# Altium PCB main.PcbDoc
Units mil, origin at the board's own origin, x right, y up, seen from the top; angles counter-clockwise.
Board outline 2372.45 x 1781.88 mil, 4 copper layers (Top Layer, GND, PWR, Bottom Layer), stack 23.756 mil thick; 73 components, 41 nets, 258 pads, 159 vias.
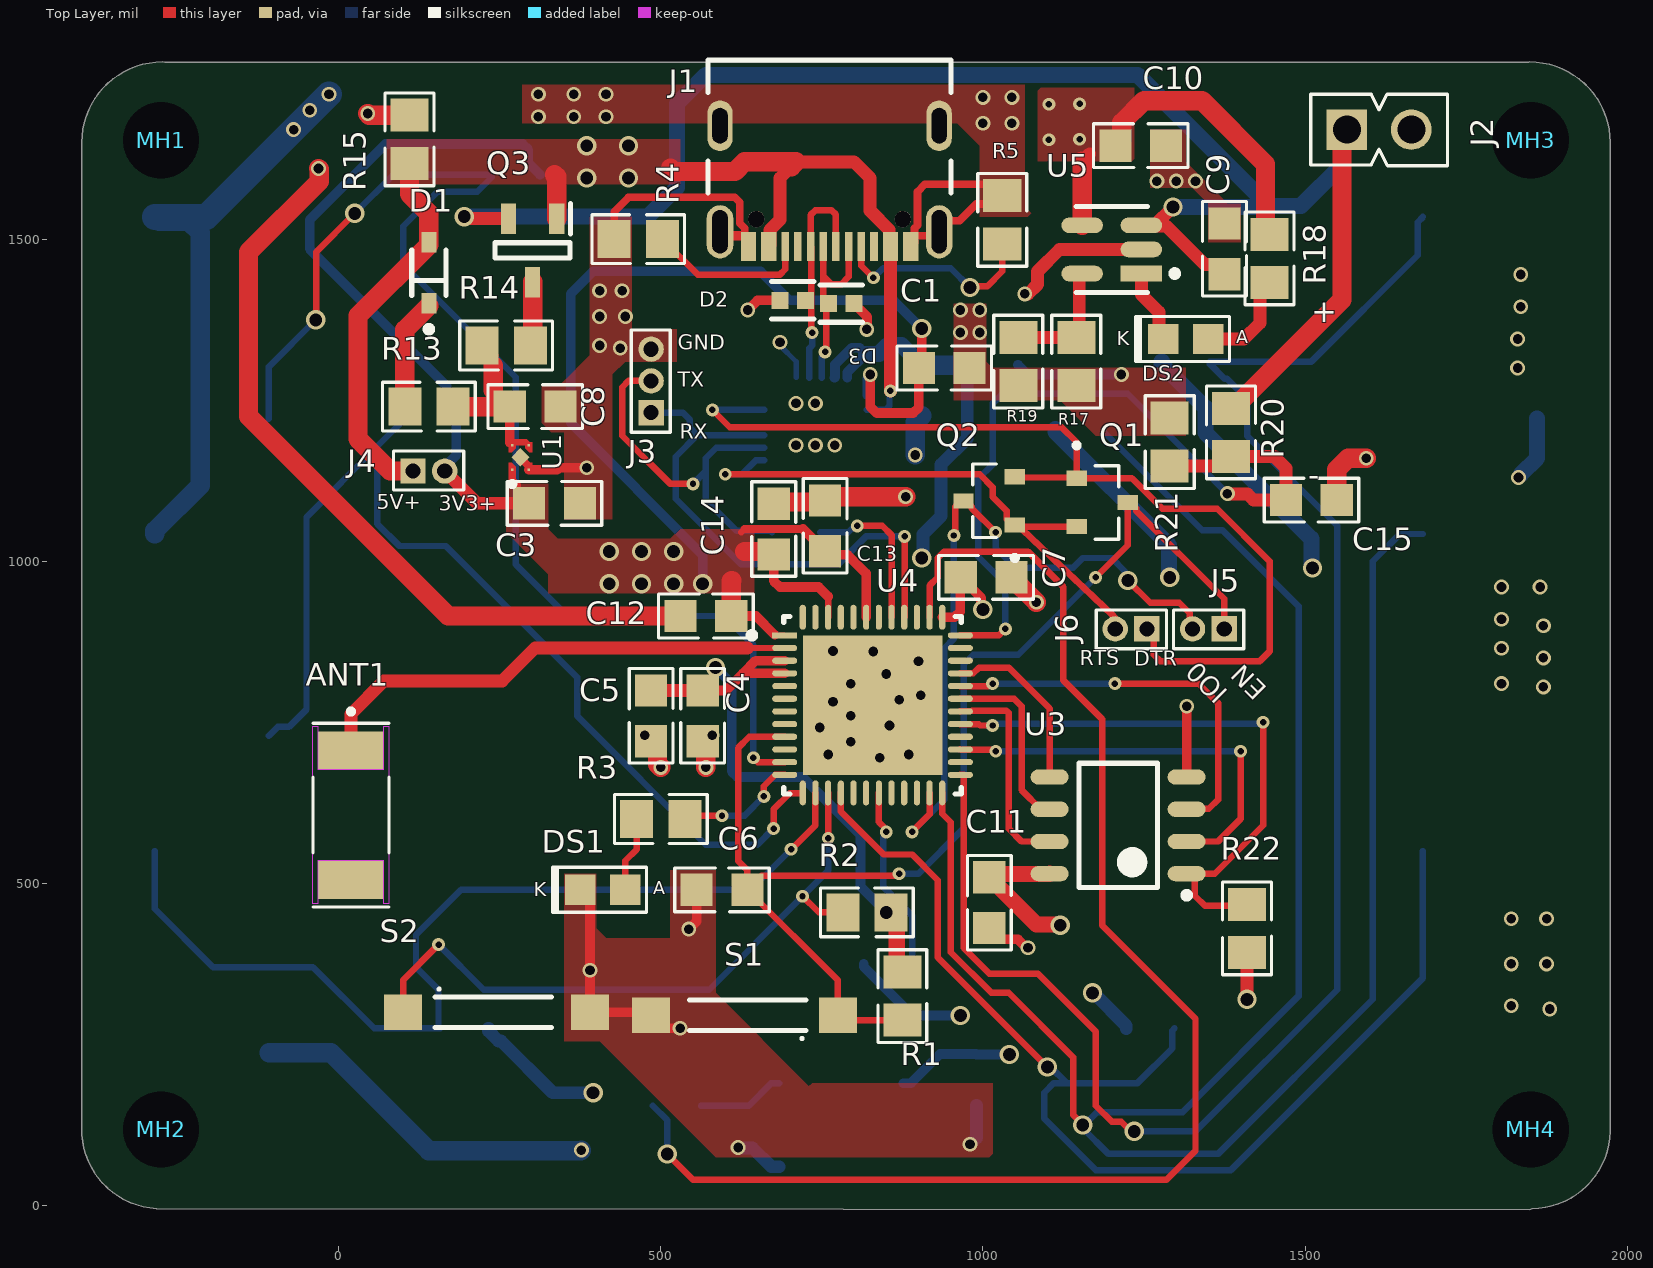
[diagram p0: Top Layer view]
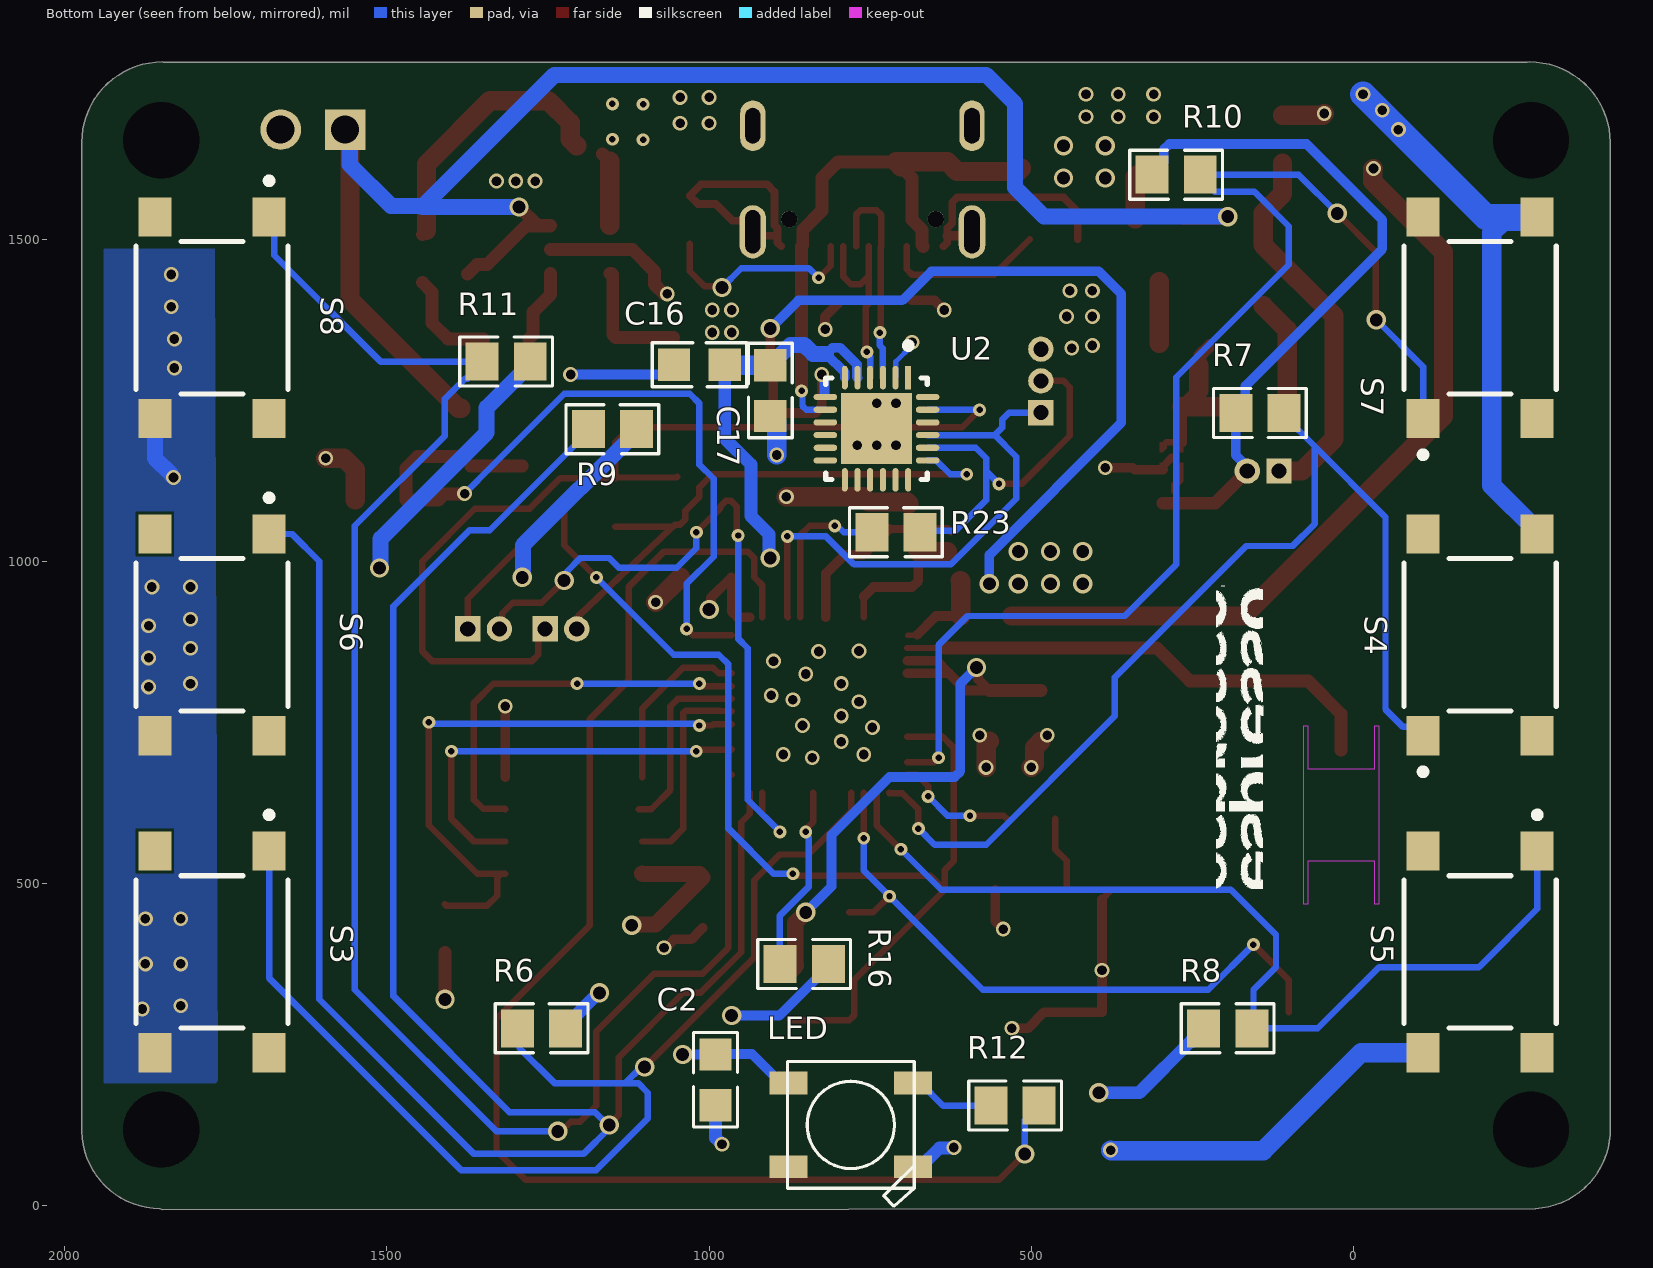
[diagram p1: Bottom Layer view, seen from below]
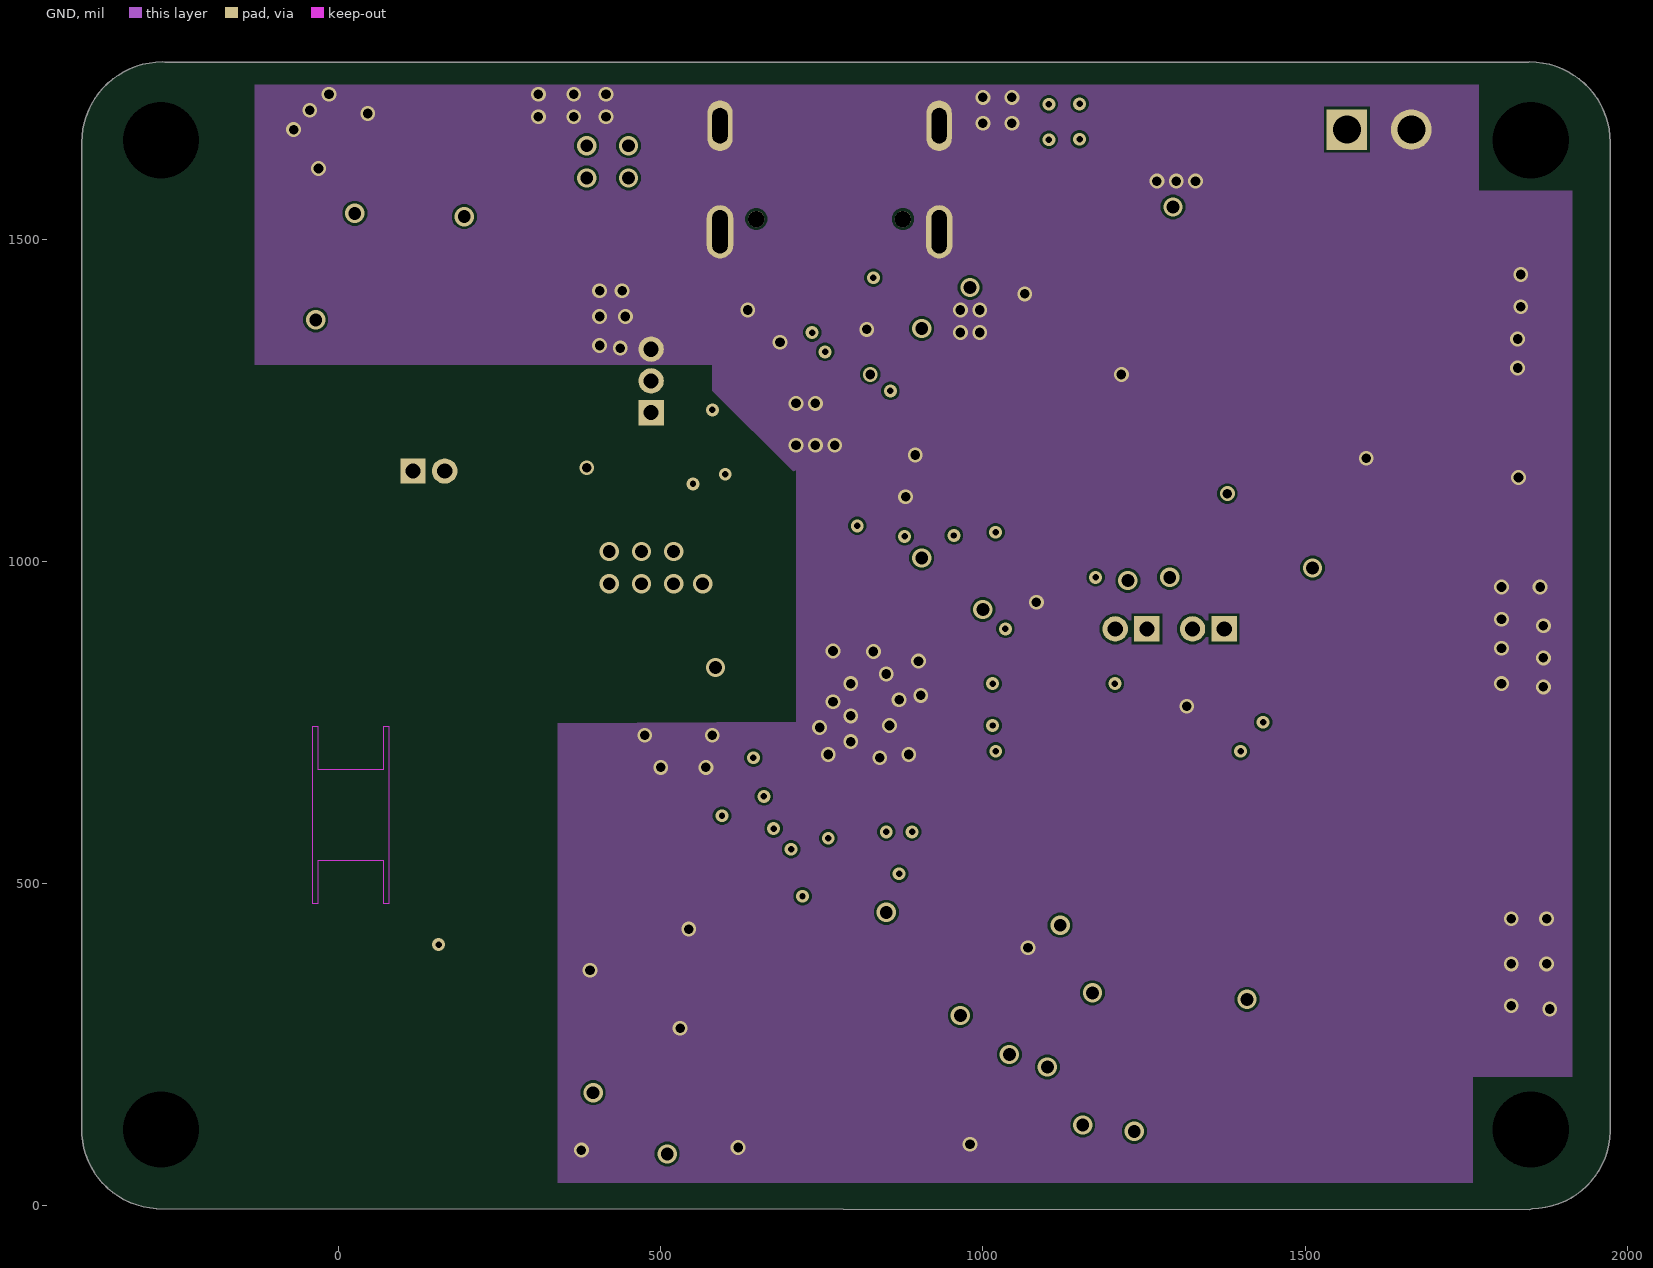
[diagram p2: GND]
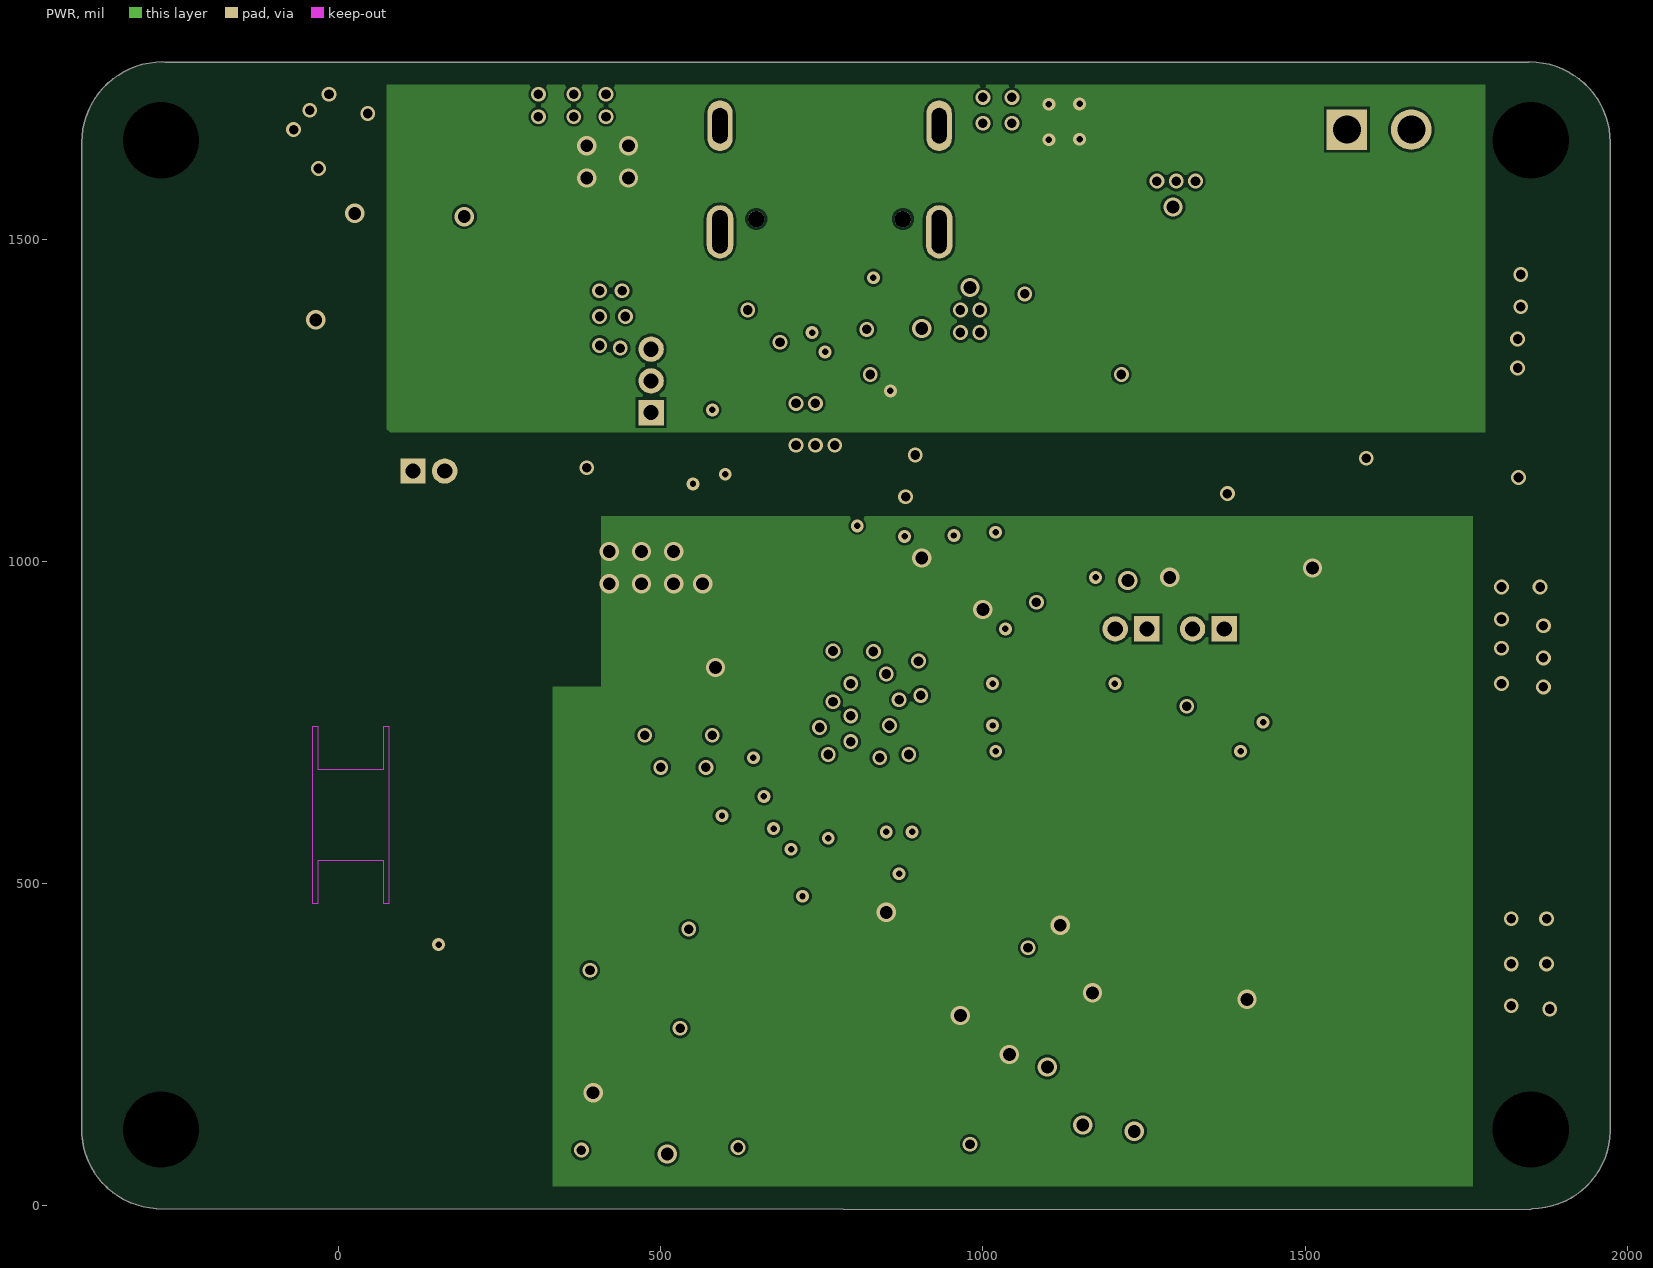
[diagram p3: PWR]
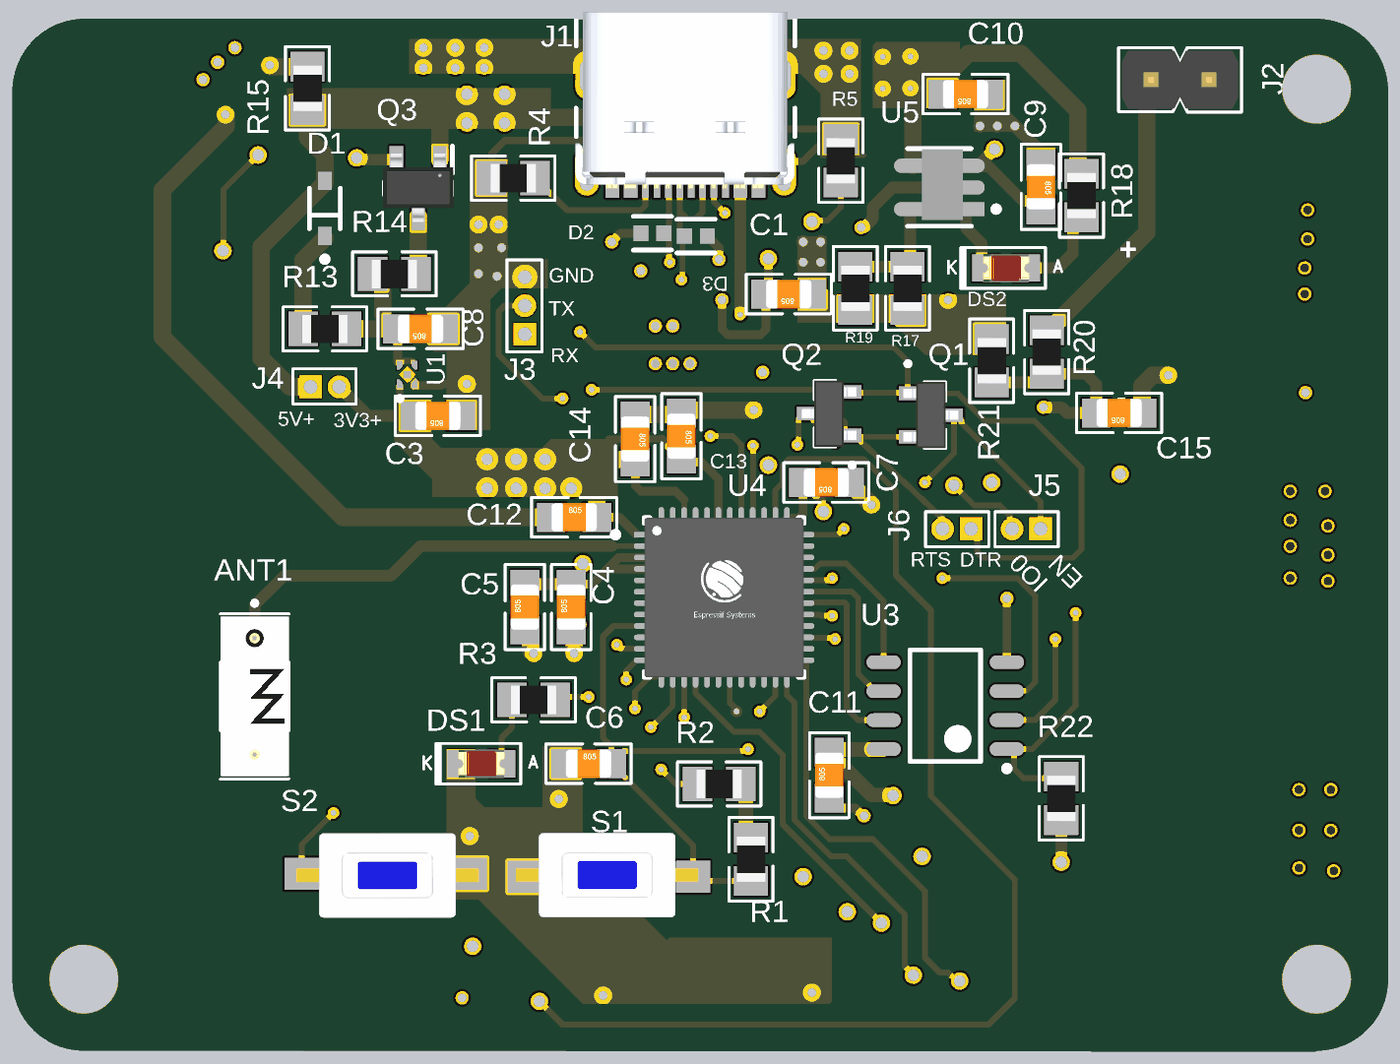
[diagram p4: 3D render of the assembled board from above, using the file's embedded part models]
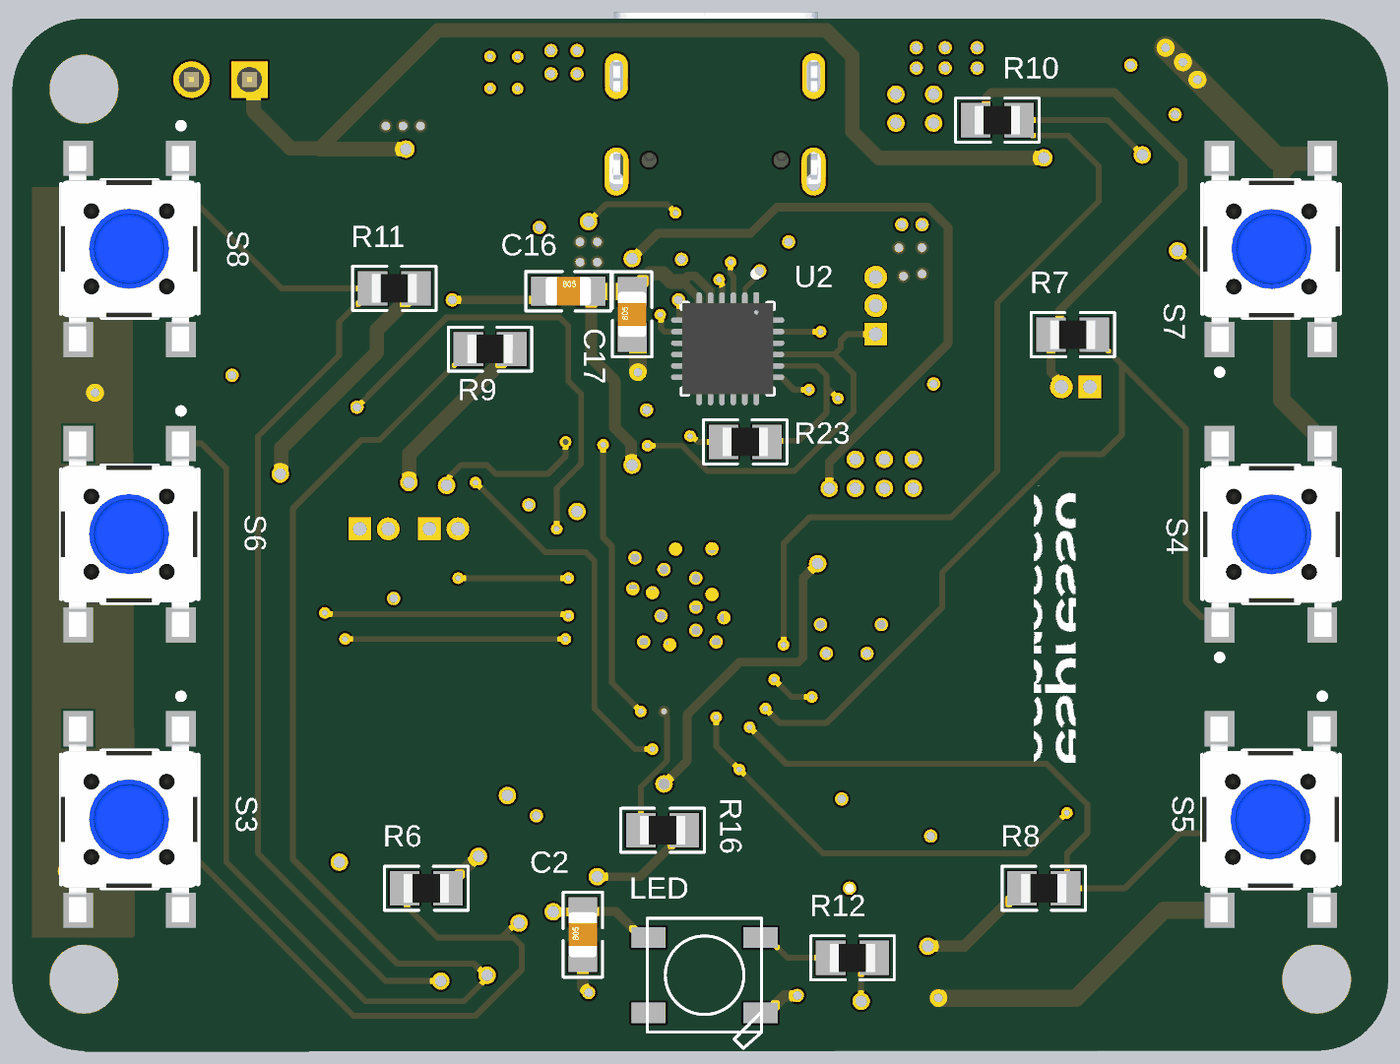
[diagram p5: 3D render of the assembled board from below, using the file's embedded part models]

## Layer stack, top to bottom
Top Solder: solder mask 0.4, Solder Resist, Dk 3.5
Top Layer: signal copper 1.4
Dielectric 2: prepreg 2.8, PP-006, Dk 4.1
GND: signal copper 1.378
Dielectric 1: dielectric 12.6, FR-4, Dk 4.8
PWR: signal copper 1.378
Dielectric 3: prepreg 2.8, PP-006, Dk 4.1
Bottom Layer: signal copper 1.4
Bottom Solder: solder mask 0.4, Solder Resist, Dk 3.5

## Board outline
-282.73,-4.87 cw(c-276.22,117.5) -398.73,120.11 -398.72,120.44 -398.72,1650 cw(c-273.7,1650) -273.7,1775.01 -270,1774.82 1847.31,1774.82 1848.7,1775.01 cw(c1848.7,1650) 1973.72,1650 1973.52,1648.61 1973.52,116.32 1973.7,114.89 cw(c1851.18,117.5) 1852.56,-5.03 1848.68,-6.87

## Design rules (kind name [scope] priority, off if disabled: settings)
Clearance [All] p1: gap=4 ignorepadtopadclearanceinfootprint=FALSE except(0: SMDPad-Hole THPad-Hole Via-Hole Fill-Hole Poly-Hole Region-Hole Text-Hole)
HoleSize [All] p1: absolutevalues=TRUE maxlimit=1000 minlimit=1 maxpercent=80.000 minpercent=20.000
MinimumSolderMaskSliver [All] p1: minsoldermaskwidth=2.8
PlaneConnect [All] p1: planeconnectstyle=Direct reliefexpansion=20 reliefentries=4 reliefconductorwidth=10 reliefairgap=10
PolygonConnect [All] p1: connectstyle=Direct reliefconductorwidth=10 reliefentries=4 polygonreliefangle="90 Angle" airgapwidth=10
RoutingVias [All] p1: holewidth=20 width=30 viastyle="Through Hole" minholewidth=10 minwidth=10 maxholewidth=30 maxwidth=50
SilkToSilkClearance [All] p1: silktosilkclearance=4
SilkToSolderMaskClearance [IsText] p1: minsilkscreentomaskgap=4 clearancetoexposedcopper=TRUE
SolderMaskExpansion [All] p1: expansion=4 istentingtop=FALSE
Width [All] p1: maxlimit=40 minlimit=4 preferedwidth=6
25 further rules are at their usual default settings.

## Classes and differential pairs
component class POWER-BATTERY: C3 C8 C9 C10 C15 D1 DS2 J2 Q3 R13 R14 R15 R17 R18 R19 R20 R21 U1 U5
component class SERIAL-CHIP: C1 C16 C17 D2 D3 J1 J3 J4 J5 J6 R4 R5 U2
component class RESET-SWITCHES: C2 LED MH1 MH2 MH3 MH4 Q1 Q2 R1 R6 R7 R8 R9 R10 R11 R12 S1 S3 S4 S5 S6 S7 S8
component class ESP32-PICO-D4-MCU: ANT1 C4 C5 C6 C7 C11 C12 C13 C14 DS1 R2 R3 R16 R22 R23 S2 U3 U4

## Components (designator, comment, footprint, x,y, rotation, side; value= is the part's Value field where it differs from the comment)
ANT1 "Fractus Antenna" Fractus_Antenna_NN01-102 20,600 r270 top
C1 "0.1uF" CAP_0805 940,1300 r180 top
C2 "0.1uF" CAP_0805 990,195 r90 bottom
C3 "1uF" CAP_0805 335,1090 r180 top
C4 "0.1uF" CAP_0805 565,760 r90 top
C5 "0.1uF" CAP_0805 485,760 r90 top
C6 "1uF" CAP_0805 595,490 r0 top
C7 "0.1uF" CAP_0805 1005,975 r180 top
C8 "1uF" CAP_0805 305,1240 r180 top
C9 "10uF" CAP_0805 1375,1485 r270 top
C10 "10uF" CAP_0805 1245,1645 r180 top
C11 "1uF" CAP_0805 1010,470 r90 top
C12 "0.1uF" CAP_0805 570,915 r0 top
C13 "0.1uF" CAP_0805 755,1055 r270 top
C14 "0.1uF" CAP_0805 675.32,1050 r270 top
C15 "0.1uF" CAP_0805 1510,1095 r180 top
C16 "1uF" CAP_0805 1015,1305 r180 bottom
C17 "0.1uF" CAP_0805 905,1265 r90 bottom
D1 "DIO_SD103AWS-E3-08_eec" diode_SD103AWS 140,1506.76 r90 top
D2 "DIO-TVS-4V-LXES15AAA1-153" Murata_LXES15_IPC_A 705,1405 r180 top
D3 "DIO-TVS-4V-LXES15AAA1-153" Murata_LXES15_IPC_A 780,1400 r0 top
DS1 "LED BLUE" LED_0805 410,490 r0 top
DS2 "LED ORANGE" LED_0805 1315,1345 r0 top
J1 "CON_USB_C_USB2.0_USB4105-GF-A" CON_USB_C_USB2.0_USB4105-GF-A 680,1650 r180 top
J2 "BERSTICK 2.5MM, MALE" CON2_100_43D62_TH_ST 1615,1670 r0 top
J3 "1.25MM STARIGHT" CON3_probing_1.25mm 485,1280 r90 top
J4 "653002114822" CON2_probing_1.25mm 140,1140 r0 top
J5 "653002114822" CON2_probing_1.25mm 1350,895 r180 top
J6 "653002114822" CON2_probing_1.25mm 1230,895 r180 top
LED "LED_RGB_WS2812B" WS2812B 780,125 r0 bottom
MH1 "Mounting Hole" MOUNTING-NO-COPPER#1 2375,120 r0 top
MH2 "Mounting Hole" MOUNTING-NO-COPPER#2 85,95 r0 top
MH3 "Mounting Hole" MOUNTING-NO-COPPER#3 1650,740 r0 top
MH4 "Mounting Hole" MOUNTING-NO-COPPER#4 1465,85 r0 top
Q1 "TRANS_NPN_SS8050-G" TRANS_NPN_SS8050-G 1180,1100 r0 top
Q2 "TRANS_NPN_SS8050-G" TRANS_NPN_SS8050-G 1015,1085 r180 top
Q3 "MOSFET-P-30V-4A-AO3401A" P_channelMos_AO3401A 306.98,1439.57 r270 top
R1 "10K" RES_0805 875,325 r90 top
R2 "10K" RES_0805 820,455 r180 top
R3 "100R" RES_0805 500,600 r0 top
R4 "5.1K" RES_0805 465,1500 r0 top
R5 "5.1K" RES_0805 1030,1530 r270 top
R6 "10K" RES_0805 1260,275 r0 bottom
R7 "10K" RES_0805 145,1230 r180 bottom
R8 "10K" RES_0805 195,275 r180 bottom
R9 "10K" RES_0805 1150,1205 r0 bottom
R10 "10K" RES_0805 275,1600 r180 bottom
R11 "10K" RES_0805 1315,1310 r0 bottom
R12 "330R" RES_0805 525,155 r180 bottom
R13 "0R" RES_0805 140,1240 r0 top
R14 "0R" RES_0805 260,1335 r0 top
R15 "100K" RES_0805 110,1655 r90 top
R16 "0R" RES_0805 852.4,375 r180 bottom
R17 "10K" RES_0805 1145,1310 r90 top
R18 "2.2K" RES_0805 1445,1470 r90 top
R19 "2.2K" RES_0805 1055,1310 r90 top
R20 "442k" RES_0805 1385,1200 r270 top
R21 "160k" RES_0805 1290,1185 r90 top
R22 "10K" RES_0805 1410,430 r90 top
R23 "510R" RES_0805 710,1045 r0 bottom
S1 "Button Tactile Switch, NO 0.05 A 0.8mm" Button8014X17N 635,295 r180 top
S2 "Button Tactile Switch, NO 0.05 A 0.8mm" Button8014X17N 240,300 r0 top
S3 "SW_TACTILE_PTS645SM43SMTR92LFS" "C&K_0_MFG - duplicate" 1771.65,393.7 r270 bottom
S4 "SW_TACTILE_PTS645SM43SMTR92LFS" "C&K_0_MFG - duplicate" -196.85,885.83 r90 bottom
S5 "SW_TACTILE_PTS645SM43SMTR92LFS" "C&K_0_MFG - duplicate" -196.85,393.7 r270 bottom
S6 "SW_TACTILE_PTS645SM43SMTR92LFS" "C&K_0_MFG - duplicate" 1771.65,885.83 r270 bottom
S7 "SW_TACTILE_PTS645SM43SMTR92LFS" "C&K_0_MFG - duplicate" -196.85,1377.95 r90 bottom
S8 "SW_TACTILE_PTS645SM43SMTR92LFS" "C&K_0_MFG - duplicate" 1771.65,1377.95 r270 bottom
U1 "REG_LDO_3V3_NCP167BMX330TBG" Reg_NCP167BMX330TBG 281.2,1159.1 r90 top
U2 "IC_CP2104-F03-GM" CP2104-F03-GM 732.16,1177.69 r270 bottom
U3 "RAM_LY68L6400" RAM_LY68L6400 1210,590 r180 top
U4 "ESP32-PICO-D4" Espressif_Systems_0_IPC_A 828.64,776.73 r0 top
U5 "IC_MCP73831T-2ATI-OT_lipo_charger" SOT-23-MCP73831T-2ATI-OT-Lipo-charger 1200,1480 r180 top

## Footprints (in the part's own frame and the unit in brackets; to place one, negate y for a bottom-side part, rotate by r counter-clockwise, add the part's x,y. Pads: shape width x height; smd on the part's side, far side on the other; paste and mask are expansions set on the pad)
Button8014X17N [mm] "Chip Inductor, 2-Leads, Body 8.00x1.40mm, IPC Medium Density"
  rect 1.5x1.4 smd: 1(-3.556,0) 2(3.81,0)
  silkscreen extent -2.3,-0.6 2.3,0.96, body extent -3.79,-1.92 4.21,1.78, height 2.5
"C&K_0_MFG - duplicate" [mm]
  rect 1.55x1.3 smd paste+0 mask+0: 1(-3.975,2.25) 2(3.975,2.25) 3(-3.975,-2.25) 4(3.975,-2.25)
  silkscreen extent -5.52,-3 3,3, body extent -4.5,-3.02 4.5,2.98, height 4.4
CAP_0805 [mil] "Ceramic Capacitor"
  rect 50x50 smd mask+3: 1(-39.37,0) 2(39.37,0)
  silkscreen extent -73,-34 73,34, body extent -39,-25 39,25, height 31
CON2_100_43D62_TH_ST [mm] "Berg Strip"
  rect 1.6x1.6 hole 1.1: 1(-1.27,0)
  round 1.6 hole 1.1: 2(1.27,0)
  silkscreen extent -2.69,-1.42 2.69,1.4, body extent -2.54,-1.27 2.54,1.27, height 8.54
CON2_probing_1.25mm [mm] "Wurth Connector"
  rect 1x1 hole 0.6 mask+0.051: 1(-0.625,0)
  round 1 hole 0.6 mask+0.051: 2(0.625,0)
  silkscreen extent -1.4,-0.75 1.37,0.79
CON3_probing_1.25mm [mm] "Wurth Connector"
  rect 1x1 hole 0.6 mask+0.051: 1(-1.25,0)
  round 1 hole 0.6 mask+0.051: 2(0,0) 3(1.25,0)
  silkscreen extent -2.02,-0.75 2.01,0.79
CON_USB_C_USB2.0_USB4105-GF-A [mm]
  rect 0.6x1.15 smd: A1_B12(-5.283,4.095) A4_B9(-4.483,4.095) B1_A12(1.117,4.095) B4_A9(0.317,4.095)
  rect 0.3x1.15 smd: A5(-3.333,4.095) A6(-2.333,4.095) A7(-1.833,4.095) A8(-0.833,4.095) B5(-0.333,4.095) B6(-1.333,4.095) B7(-2.833,4.095) B8(-3.833,4.095)
  oval 1.05x2.1 hole 0.6 slot 1.7 at 90 deg: S1(-6.403,3.52) S4(2.237,3.52)
  oval 1x2 hole 0.6 slot 1.4 at 90 deg: S2(-6.403,-0.66) S3(2.237,-0.66)
  round 0.65 hole 0.65 unplated: ""(-4.973,3.02) ""(0.807,3.02)
  silkscreen extent -6.87,-3.26 2.71,1.99, body extent -6.85,-3.45 2.73,4.26, height 3.31
CP2104-F03-GM [mil]
  rect 36.58x9.42 smd paste+0 mask+0: 1(-107.31,41.21)
  rrect100% 36.58x9.42 smd paste+0 mask+0: 2(-107.31,21.53) 3(-107.31,1.84) 4(-107.31,-17.84) 5(-107.31,-37.53) 6(-107.31,-57.21) 13(51.31,-57.21) 14(51.31,-37.53) 15(51.31,-17.84) 16(51.31,1.84) 17(51.31,21.53) 18(51.31,41.21)
  rrect100% 9.42x36.58 smd paste+0 mask+0: 7(-77.21,-87.31) 8(-57.53,-87.31) 9(-37.84,-87.31) 10(-18.16,-87.31) 11(1.53,-87.31) 12(21.21,-87.31) 19(21.21,71.31) 20(1.53,71.31) 21(-18.16,71.31) 22(-37.84,71.31) 23(-57.53,71.31) 24(-77.21,71.31)
  rect 110.24x110.24 smd paste-39370.1 mask+0: 25(-28,-8)
  silkscreen extent -162,-87 51,71, body extent -107,-87 51,71, height 32
diode_SD103AWS [mm]
  rect 0.8x0.6 smd paste+0 mask+0: 1(-2.699,0) 2(-0.299,0)
  silkscreen extent -3.85,-0.67 -0.61,0.67
Espressif_Systems_0_IPC_A [mm]
  rect 0.985x0.242 smd paste+0 mask+0: 1(-3.463,2.75)
  rrect100% 0.985x0.242 smd paste+0 mask+0: 2(-3.463,2.25) 3(-3.463,1.75) 4(-3.463,1.25) 5(-3.463,0.75) 6(-3.463,0.25) 7(-3.463,-0.25) 8(-3.463,-0.75) 9(-3.463,-1.25) 10(-3.463,-1.75) 11(-3.463,-2.25) 12(-3.463,-2.75) 25(3.463,-2.75) 26(3.463,-2.25) 27(3.463,-1.75) 28(3.463,-1.25) 29(3.463,-0.75) 30(3.463,-0.25) 31(3.463,0.25) 32(3.463,0.75) 33(3.463,1.25) 34(3.463,1.75) 35(3.463,2.25) 36(3.463,2.75)
  rrect100% 0.242x0.985 smd paste+0 mask+0: 13(-2.75,-3.463) 14(-2.25,-3.463) 15(-1.75,-3.463) 16(-1.25,-3.463) 17(-0.75,-3.463) 18(-0.25,-3.463) 19(0.25,-3.463) 20(0.75,-3.463) 21(1.25,-3.463) 22(1.75,-3.463) 23(2.25,-3.463) 24(2.75,-3.463) 37(2.75,3.463) 38(2.25,3.463) 39(1.75,3.463) 40(1.25,3.463) 41(0.75,3.463) 42(0.25,3.463) 43(-0.25,3.463) 44(-0.75,3.463) 45(-1.25,3.463) 46(-1.75,3.463) 47(-2.25,3.463) 48(-2.75,3.463)
  rect 5.5x5.5 smd paste-1000 mask+0: 49(0,0)
  silkscreen extent -4.88,-3.5 3.5,3.5, body extent -4.46,-4.46 4.46,4.46, height 0.25
Fractus_Antenna_NN01-102 [mm]
  rect 1.5x2.6 smd: 1(-2.702,-0.025) 2(2.398,-0.025)
  Keep-Out Layer region: 3.348,1.275 1.648,1.275 1.648,-1.325 3.338,-1.325 3.348,-1.525 -3.652,-1.525 -3.652,-1.325 -1.952,-1.325 -1.952,1.275 -3.652,1.275 -3.652,1.475 3.348,1.475
  Keep-Out Layer region: 3.348,1.275 1.648,1.275 1.648,-1.325 3.338,-1.325 3.348,-1.525 -3.652,-1.525 -3.652,-1.325 -1.952,-1.325 -1.952,1.275 -3.652,1.275 -3.652,1.475 3.348,1.475
  silkscreen extent -4.33,-1.53 3.47,1.47, body extent -3.65,-1.53 3.35,1.47, height 2.2
LED_0805 [mm] "LED"
  rect 1.2x1.2 smd mask+0.076: A(0.889,0) K(-0.889,0)
  silkscreen extent -1.99,-0.89 1.73,0.89, body extent -1.01,-0.62 1.01,0.63, height 1.1
MOUNTING-NO-COPPER#1 [mm] "MH"
  round 0 hole 3: 1(-67.325,38.952)
MOUNTING-NO-COPPER#2 [mm] "MH"
  round 0 hole 3: 1(-9.159,0.587)
MOUNTING-NO-COPPER#3 [mm] "MH"
  round 0 hole 3: 1(5.09,23.204)
MOUNTING-NO-COPPER#4 [mm] "MH"
  round 0 hole 3: 1(9.789,0.841)
Murata_LXES15_IPC_A [mil]
  rect 26.19x26.48 smd paste+0 mask+0: 1(-19.83,0) 2(19.83,0)
  silkscreen extent -33,-29 33,29
P_channelMos_AO3401A [mm]
  rect 1.2x0.6 smd: 1(-2.342,0.798) 2(-2.342,-1.102) 3(0.158,-0.152)
  silkscreen extent -2.94,-1.63 -0.79,1.35, body extent -2.62,-1.7 0.38,1.4, height 1.25
RAM_LY68L6400 [mm] "SOIC, 8-Leads, Body 4.90x3.90mm, Pitch 1.27mm, IPC Medium Density"
  oval 1.5x0.6 smd: 1(-2.7,1.905) 2(-2.7,0.635) 3(-2.7,-0.635) 4(-2.7,-1.905) 5(2.7,-1.905) 6(2.7,-0.635) 7(2.7,0.635) 8(2.7,1.905)
  silkscreen extent -2.83,-2.45 1.55,2.88, body extent -1.95,-2.45 1.95,2.45, height 1.75
Reg_NCP167BMX330TBG [mm]
  rect 0.1x0.1 smd paste-1 mask+0: 1(-0.429,0.3) 2(-0.429,-0.35) 3(0.531,-0.35) 4(0.531,0.3)
  rect 0.52x0.52 smd rot 135 paste-1 mask+0: 5(0.051,-0.025)
  Top Layer region: 0.651,0.17 0.411,0.17 0.261,0.32 0.261,0.43 0.651,0.43
  Top Layer region: -0.159,0.32 -0.309,0.17 -0.549,0.17 -0.549,0.43 -0.159,0.43
  Top Layer region: -0.159,-0.37 -0.159,-0.48 -0.549,-0.48 -0.549,-0.22 -0.309,-0.22
  Top Layer region: 0.651,-0.48 0.261,-0.48 0.261,-0.37 0.411,-0.22 0.651,-0.22
  silkscreen extent -1.1,0.2 -0.9,0.4
RES_0805 [mm] "Resister"
  rect 1.3x1.5 smd mask+0.076: 1(0.95,0) 2(-0.95,0)
  silkscreen extent -1.83,-0.97 1.83,0.97, body extent -1,-0.63 1,0.62, height 0.5
SOT-23-MCP73831T-2ATI-OT-Lipo-charger [mil]
  rect 64.5x24.33 smd paste+0 mask+0: 1(-45.91,33.4)
  rrect100% 64.5x24.33 smd paste+0 mask+0: 2(-45.91,-4) 3(-45.91,-41.4) 4(45.91,-41.4) 5(45.91,33.4)
  silkscreen extent -103,-71 55,63, body extent -40,-70 30,52, height 57
TRANS_NPN_SS8050-G [mm]
  rect 0.8x0.6 smd: 1(-0.877,0.728) 2(-0.877,-1.172) 3(1.143,-0.222)
  silkscreen extent -0.98,-1.67 0.78,2.13, body extent -1.07,-1.67 1.33,1.23, height 1.14
WS2812B [mm]
  rect 1.5x0.9 smd: 1-VDD(2.45,-1.65) 2-DOUT(2.45,1.65) 3-GND(-2.45,1.65) 4-DIN(-2.45,-1.65)
  silkscreen extent -2.5,-2.5 2.5,3.2

## Part data
ANT1: library part ANT_2.45GHz_Bluetooth_WLAN_Zigbee_1.7dBi_NN01-102, "2.45GHz Bluetooth, WLAN, Zigbe Chip RF Antenna 2.4GHz ~ 2.5GHz 1.7dBi Solder Surface Mount"
C1 C2 C4 C5 C7 C12 C13 C14 C17: library part CAP_0.1uF-50V-10%-0805, "0.1µF ±10% 50V Ceramic Capacitor X7R 0805 (2012 Metric)", Alternate Part Number-1=NA, Case/Package=0805, manufacturer=Samsung, Manufacturer Part Number=CL21B104KBCNNNC, Supplier Part Number-1=0805B104K500CT, Supplier-1=SIRICOM
C3 C6 C8 C11 C16: library part CAP_1uF-50V-10%-0805_1, "1µF ±10% 50V Ceramic Capacitor X7R 0805 (2012 Metric)", Alternate Part Number-1=NA, Case/Package=0805, manufacturer=Samsung, Manufacturer Part Number=CL21B104KBCNNNC, Supplier Part Number-1=0805B104K500CT, Supplier-1=SIRICOM
C9 C10: library part CAP_10uF-50V-10%-0805_1, "10µF ±10% 50V Ceramic Capacitor X7R 0805 (2012 Metric)", Alternate Part Number-1=NA, Case/Package=0805, manufacturer=Samsung, Manufacturer Part Number=CL21B104KBCNNNC, Supplier Part Number-1=0805B104K500CT, Supplier-1=SIRICOM
C15: library part CAP_0.1uF-50V-20%-0805, "0.1µF ±20% 50V Ceramic Capacitor X7R 0805 (2012 Metric)", Alternate Part Number-1=NA, Case/Package=0805, manufacturer="Samsung Electro-Mechanics", Manufacturer Part Number=CL21B104MBCNNNC, Supplier Part Number-1=0805B104K500CT, Supplier-1=SIRICOM
D1: "DIODE SCHOTTKY 40V 350MA SOD323", Digikey Part Number=SD103AWS-E3-08GICT-ND, manufacturer=Vishay, Mouser Part Number=78-SD103AWS-E3-08, Package=SOD-323, Part Number=SD103AWS-E3-08, Temperature="-55°C to +125°C", Temperature Range High=+125°C, Temperature Range Low=-55°C, componentlink1description=Upverter, componentlink1url=https://upverter.com/upn/revision/8fad8ef220f1dfef/, componentlink2description=Datasheet, componentlink2url=https://www.vishay.com/docs/81142/sd103aws.pdf, Digikey Description="DIODE SCHOTTKY 40V 350MA SOD323", helpURL=https://upverter.com/upn/revision/8fad8ef220f1dfef/, Lead Free=yes, price=0.161793690066, RoHS=TRUE, Supplier 1=Digi-Key, Supplier 2=Mouser, Supplier Part Number 1=SD103AWS-E3-08GICT-ND, Supplier Part Number 2=78-SD103AWS-E3-08
D2 D3: "ESD Suppressor Diode TVS Bi-Dir 4V 2-Pin Case 0402(1005Metric) T/R"
DS1: library part LED_BLUE-3V3-20mA-0805, "Blue 470nm LED Indication - Discrete 3.3V 0805 (2012 Metric)", Alternate Part Number-1=NA, Case/Package=0805, manufacturer="Vishay Lite-On", Manufacturer Part Number=LTST-C171TBKT, Supplier Part Number-1=LTST-C171TBKT, Supplier-1="SP ROAD"
DS2: library part LED_ORANGE-2V-20mA-0805, "Orange 605nm LED Indication - Discrete 2V 0805 (2012 Metric)", Alternate Part Number-1=NA, Case/Package=0805, manufacturer="Vishay Lite-On", Manufacturer Part Number=LTST-C170KFKT, Supplier Part Number-1=LTST-C170KFKT, Supplier-1="SP ROAD"
J2: library part CON-BS-PLG_2X1-100-ST-TH, "2 Pins, 1 Row 2.54mm Pitch, Straight bergstrip, Male", Alternate Part Number-1=NA, Case/Package=TH-CON, manufacturer=Samtec, Manufacturer Part Number=NA, Supplier Part Number-1=NA, Supplier-1="SP ROAD"
J3: library part CON-3-1.25MM-PROBING, "3 Pins, 1 Row 1.25mm Pitch, straight Connector, male", Alternate Part Number-1=NA, Case/Package=TH-CON, Crimp Part Number=653153128130, manufacturer=WURTH, Manufacturer Part Number=653003114822, Mating Part Number=653003113322, Supplier Part Number-1=653003114822, Supplier-1=WURTH
J4 J5 J6: library part CON-2-1.25MM-PROPING, "2 Pins, 1 Row 1.25mm Pitch, Straight Connector, male", Alternate Part Number-1=NA, Case/Package=TH-CON, Crimp Part Number=653153128130, manufacturer=JST, Mating Part Number=653002113322, Manufacturer Part Number=653002114822, Supplier Part Number-1=653002114822, Supplier-1=WURTH
LED: "Raspberry Pi HAT _40 pin_ Wheeled Robotics Kit", Package=None, Availability=Unavailable, MF="SparkFun Electronics", MP=WS2812B, price=None, SnapEDA_Link=https://www.snapeda.com/parts/WS2812B/Worldsemi/view-part/1038297/?ref=snap
MH1 MH2 MH3 MH4: library part MH_3H_ONLY_1, Alternate Part Number-1=NA, Case/Package=TH, manufacturer=NA, Manufacturer Part Number=NA, Supplier Part Number-1=NA, Supplier-1=NA
Q1 Q2: "Bipolar (BJT) Transistor NPN 25 V 1.5 A 100MHz 300 mW Surface Mount SOT-23-3"
Q3: "30V P-Channel MOSFET 4A Rdson = 85 mOhms"
R1 R2 R6 R7 R8 R9 R10 R11 R17 R22: library part RES_10K-0.125W-1%-0805, "10 kOhms ±1% 0.125W, 1/8W Chip Resistor 0805 (2012 Metric) Automotive AEC-Q200 Thick Film", Alternate Part Number-1=WR08X1002FTL, Case/Package=0805, manufacturer=CTS, Manufacturer Part Number=WR08X1002FTL, Supplier Part Number-1=WR08X1002FTL, Supplier-1=SIRICOM
R3: library part RES_100R-0.125W-1%-0805, "100 Ohms ±1% 0.125W, 1/8W Chip Resistor 0805 (2012 Metric) Automotive AEC-Q200, Pulse Withstanding Thick Film", Alternate Part Number-1=WR08X1000FTL, Case/Package=0805, manufacturer=Walsin, Manufacturer Part Number=WR08X1000FTL, Supplier Part Number-1=WR08X1000FTL, Supplier-1=SIRICOM
R4 R5: library part RES_5.1K-0.125W-1%-0805, "5.1 kOhms ±1% 0.125W, 1/8W Chip Resistor 0805 (2012 Metric) Moisture Resistant Thick Film", Alternate Part Number-1=NA, Case/Package=0805, manufacturer="Stackpole Electronics", Manufacturer Part Number=RC0805FR-075K9L, Supplier Part Number-1=WR08X5901FTL, Supplier-1=SIRICOM
R12: library part RES_330R-0.125W-1%-0805, "330 Ohms ±1% 0.125W, 1/8W Chip Resistor 0805 (2012 Metric) Automotive AEC-Q200 Thick Film", Alternate Part Number-1=NA, Case/Package=0805, manufacturer=Walsin, Manufacturer Part Number=WR08X3300FTL, Supplier Part Number-1=WR08X3300FTL, Supplier-1=SIRICOM
R13 R14 R16: library part RES_0R-0.125W-1%-0805, "0 Ohms Jumper 0.125W, 1/8W Chip Resistor 0805 (2012 Metric) Automotive AEC-Q200 Thick Film", Alternate Part Number-1=WR08X000PTL, Case/Package=0805, manufacturer=Walsin, Manufacturer Part Number=WR08X000PTL, Supplier Part Number-1=WR08X000PTL, Supplier-1=SIRICOM
R15: library part RES_100K-0.125W-1%-0805, "100 kOhms ±1% 0.125W, 1/8W Chip Resistor 0805 (2012 Metric) Automotive AEC-Q200 Thick Film", Alternate Part Number-1=NA, Case/Package=0805, manufacturer=Walsin, Manufacturer Part Number=WR08X1003FTL, Supplier Part Number-1=WR08X1003FTL, Supplier-1=SIRICOM
R18 R19: library part RES_2.2K-0.125W-1%-0805, "2.2 kOhms ±1% 0.125W, 1/8W Chip Resistor 0805 (2012 Metric) Thick Film", Alternate Part Number-1=CR0805F82201G, Case/Package=0805, manufacturer="Stackpole Electronics", Manufacturer Part Number=CRG0805F2K2, Supplier Part Number-1=WR08X2201FTL, Supplier-1=SIRICOM
R20: library part RES_442K-0.125W-1%-0805_1, "442kOhms ±1% 0.125W, 1/8W Chip Resistor 0805 (2012 Metric) Thick Film", Alternate Part Number-1=NA, Case/Package=0805, manufacturer="TE Connectivity Passive Product", Manufacturer Part Number=CRG0805F1K5, Supplier Part Number-1=NA, Supplier-1=SIRICOM
R21: library part RES_160K-0.125W-1%-0805_1_1, "160kOhms ±1% 0.125W, 1/8W Chip Resistor 0805 (2012 Metric) Thick Film", Alternate Part Number-1=NA, Case/Package=0805, manufacturer="TE Connectivity Passive Product", Manufacturer Part Number=CRG0805F1K5, Supplier Part Number-1=NA, Supplier-1=SIRICOM
R23: library part RES_510R-0.125W-1%-0805, "510 Ohms ±1% 0.125W, 1/8W Chip Resistor 0805 (2012 Metric) Thin Film", Alternate Part Number-1=NA, Case/Package=0805, manufacturer=Yageo, Manufacturer Part Number=RT0805FRE07510RL, Supplier Part Number-1=WR08X5100FTL, Supplier-1=SIRICOM
S1 S2: manufacturer="C & K", Manufacturer Part No.=B3F1000, Creator="R Kanjee", Date Created="25 February 2015", RS Stock No.=516-255, State="Normaly Open"
U1: "Linear Voltage Regulator IC 1 Output 700mA 4-XDFN _1x1_", Package="XDFN-4 ON Semiconductor", Digi-Key_Part_Number=NCP167BMX330TBGOSCT-ND, Digi-Key_Purchase_URL=https://www.digikey.de/product-detail/en/on-semiconductor/NCP167BMX330TBG/NCP167BMX330TBGOSCT-ND/9749419?utm_source=snapeda&utm_medium=aggregator&utm_campaign=symbol, MF="ON Semiconductor", MP=NCP167BMX330TBG, SnapEDA_Link=https://www.snapeda.com/parts/NCP167BMX330TBG/ON%20Semiconductor/view-part/3624496/?ref=snap

## Via types
v1: diameter 23, hole 15, Top Layer to Bottom Layer, 91 vias
v2: diameter 20, hole 10, Top Layer to Bottom Layer, 34 vias
v3: diameter 30, hole 20, Top Layer to Bottom Layer, 34 vias

## Nets (pads, with @x,y where several pads share a name; then routed paths per layer and width w, separated by ;. In a path a pad name is that pad's centre, name@x,y a point inside that pad or via, vN(x,y) a via of type N, cw(c..) or ccw(c..) an arc to the next point about the centre after c; other vN are vias at no path point)
+3V3: C1.2 C2.2 C3.2 C4.2 C5.2 C7.2 C11.2 C12.2 C13.2 C14.2 C16.2 C17.2 J4.2 LED.1-VDD R1.1 R2.2 R6.2 R7.2 R8.2 R9.2 R10.2 R11.2 R16.1 R22.2 U1.1 U2.5 U2.6 U2.7 U3.8 U4.1 U4.3 U4.4 U4.37 U4.43 U4.46 | length 6659.4
  Top Layer w8: U4.1@676.89,885.77 691.52,885.77 U4.1 677.67,885 U4.1@676.89,885.77
  Top Layer w10: 625,1045 630,1050 ; C13.2 C13.2@760.63,1010 ; U4.46 759.75,945.25
  Top Layer w12: U1.1 269.41,1125.59 276.63,1118.37 C3.2@276.63,1109 ; 630,1050 720.63,1050
  Top Layer w15: v3(585,835) 585,833.65 582.5,831.14 582.5,816.87 C4.2 601.07,799.37 627.64,825.94 ; C12.2 647.67,915 U4.1@676.89,885.77 ; C14.2 675.32,969.68 685,960 745,960 759.75,945.25 ; U4.4 627.64,825.94 ; U4.3 647.32,845.63 627.64,825.94 ; 720.63,1050 C13.2 ; C13.2@760.63,1010 790,1010 818.8,981.2 U4.43 ; v1(825,1290) 825,1240 835,1230 891.84,1230 900.63,1238.79 C1.2 ; C1.2@905,1304.37 v3(905,1361.21) ; U4.37 956.21,913.09 965,921.87 965,974.37 C7.2 997.13,943.49 997.13,927.87 v3(1000,925)
  Top Layer w20: J4.2 214.61,1090 C3.2 ; C5.2 C4.2 ; v3(1410,320) R22.2
  Top Layer w25: v3(850,455) 866.2,438.8 866.2,373.6 865,372.4 R1.1 ; U3.8 1103.01,514.31 1014.93,514.31 C11.2 1083.41,435.96 1119.04,435.96 v3(1120,435)
  Top Layer w30: C12.2 609.37,969.37 610,970 ; 630,1015 C14.2@675.32,1015
  Bottom Layer w15: J4.2 164.61,1146.59 182.4,1164.39 R7.2 167.73,1244.67 167.73,1272.27 -45,1485 -45,1530 72.6,1647.6 285.52,1647.6 294.31,1638.81 294.31,1618.09 R10.2 ; v3(565,965) 565,1010 360,1215 360,1415 395,1450 655,1450 700,1405 861.21,1405 v3(905,1361.21) ; v3(585,835) 610,810 610,673.79 618.79,665 720,665 810,575 810,495 v3(850,455) ; U2.5 770.37,1285.68 770.37,1305.37 796.35,1331.35 808.77,1331.35 818.24,1321.87 789.37,1293 U2.6 ; R16.1 815,371.06 891.06,295 v3(965,295) ; U2.7@820.75,1257.69 820.75,1283.58 825,1287.84 v1(825,1290) ; LED.1-VDD 888.27,189.96 933.31,235 989.38,235 C2.2 v3(1041,234.37) ; C17.2@887.5,1321.87 C17.2
  Bottom Layer w20: R8.2 232.4,271.07 247.99,255.48 251.93,255.48 332.4,175 v3(395,175) ; v3(905,1005) 906.91,1006.91 906.91,1041.91 935,1070 935,1150 975.63,1190.63 C16.2 ; v3(1170,330) 1171.54,330 1222.6,278.93 R6.2
  Bottom Layer w25: 818.24,1321.87 838.61,1321.87 852.7,1335.96 873.41,1335.96 C17.2@887.5,1321.87 ; R9.2 1112.6,1201.06 1289.04,1024.62 1289.04,975.96 v3(1290,975) ; R11.2 1277.6,1306.06 1345.35,1238.32 1345.35,1199.65 1510,1035 1510,990 1510.49,989.51 v3(1511.75,989.51)
  Bottom Layer w30: C17.2 C16.2@970,1304.37
  other v3: 420,965 470,965 520,965 420,1015 470,1015 520,1015
BT1: R6.1 S3.1 U4.16 | length 1866.1
  Top Layer w10: U4.16 779.43,611.61 846.26,544.78 890.22,544.78 930,505 930,385 v3(1100,215)
  Bottom Layer w10: v3(1100,215) 1105,215 1130,190 ; R6.1 1293.7,271.29 1293.7,243.7 1240,190 1130,190 ; S3.1 1683.07,353.07 1385,55 1175,55 1095,135 1095,175 1110,190 1130,190
BT2: R9.1 S6.1 U4.24 | length 3409.7
  Top Layer w10: U4.24 936.91,608.09 950,595 950,393.28 1013.28,330 1040,330 1140,230 1140,140.86 1155,125.86 v3(1155,125)
  Bottom Layer w10: R9.1 1187.4,1201.06 1340.28,1048.18 1371.94,1048.18 1490,930.12 1490,325 1310,145 1177.43,145 1157.43,125 v3(1155,125) 1155,120 1195,80 1365,80 1605,320 1605,1000 1647.32,1042.32 S6.1
BT3: R11.1 S8.1 U4.25 | length 2642.9
  Top Layer w10: U4.25 970.06,668.46 970.29,668.24 970.29,399.71 1010,360 1085,360 1175,270 1175,155 1200.25,129.75 1214.84,129.75 1229.59,115 v3(1235,115)
  Bottom Layer w10: v3(1235,115) 1330,115 1550,335 1550,1055 1410,1195 1410,1252.4 1378.93,1283.47 1375,1283.47 1352.4,1306.06 R11.1 1510,1310 1675,1475 1675,1526.38 S8.1
BT4: R10.1 S7.1 U4.11 | length 2028.9
  Top Layer w10: v3(-35.68,1374.71) -35.29,1374.71 -35,1375 -35,1480 v3(25,1540) ; v2(643.79,695) 650.64,688.15 U4.11
  Bottom Layer w10: S7.1 -108.27,1302.13 v3(-35.68,1374.71) ; v3(25,1540) 85,1600 R10.1 237.6,1596.07 215,1573.48 153.48,1573.48 100,1520 100,1460.47 275,1285.47 275,995 355,915 598.79,915 643.79,870 v2(643.79,695)
BT5: R8.1 S5.1 U4.14 | length 1511
  Top Layer w10: v2(702.33,552.88) 702.88,552.88 740,590 740,640.32 U4.14
  Bottom Layer w10: S5.1 -285.43,460.43 -195,370 -40,370 55,275 154.98,275 R8.1 154.98,277.61 154.98,335.02 120,370 120,420 190,490 639.45,490 v2(702.33,552.88)
BT6: R7.1 S4.1 U4.13 | length 1673.6
  Top Layer w10: v2(675,585) 675,615 700,640 720,640 U4.13
  Bottom Layer w10: S4.1 -94.79,742.81 -77.19,742.81 -50,770 -50,1068.47 60,1178.47 ; R7.1 107.6,1226.07 60,1178.47 ; v2(675,585) 650,560 570,560 370,760 370,820 166.38,1023.62 94.25,1023.62 60,1057.87 60,1178.47
CC1: J1.B5 R4.1 | length 252.5
  Top Layer w10: R4.1 557.41,1445 685,1445 693.1,1453.1 J1.B5
CC2: J1.A5 R5.1 | length 328.2
  Top Layer w10: J1.A5 811.21,1458.79 v2(830,1440) ; v3(980,1425) 982,1427 1007,1427 1030,1450 R5.1
  Bottom Layer w10: v2(830,1440) 845,1455 950,1455 v3(980,1425)
CLK: U3.6 U4.31 | length 291.7
  Top Layer w10: U4.31 1048.43,786.57 1060,775 1060,645 1090,615 U3.6@1109.5,615
D_LED: R12.1 U4.38 | length 2218.5
  Top Layer w10: v3(510,80) 550,40 1285,40 1330,85 1330,290 1185,435 1185,755 1125,815 1125,960 1070,1015 940,1015 930,1005 930,975 917.23,962.23 U4.38
  Bottom Layer w10: R12.1 510,132.6 v3(510,80)
D_N: D3.1 J1.A7 J1.B7 U2.4 | length 305.4
  Top Layer w10: J1.A7 752.16,1442.84 ; v2(755,1325) 756.91,1326.91 756.91,1395.24 752.16,1400 752.16,1442.84 ; J1.B7 791.53,1441.53 780,1430 765,1430 752.16,1442.84
  Bottom Layer w10: U2.4 750,1317.29 755,1322.29 v2(755,1325)
D_P: D2.1 J1.A6 J1.B6 U2.3 | length 350.1
  Top Layer w10: v2(735,1355) 733.74,1356.26 733.74,1487.53 J1.B6 732.47,1537.47 740,1545 765,1545 771.84,1538.16 J1.A6
  Bottom Layer w10: U2.3 730.32,1330.32 735,1335 v2(735,1355)
DTR: J6.1 Q1.1 Q2.2 U2.23 | length 1547.7
  Top Layer w10: v2(580,1235) 607,1208 1122.08,1208 1145.49,1184.58 Q1.1 ; Q2.2 1050.65,1130 1144.16,1130 Q1.1 ; J6.1 1265,884.61 1265,855 1275,845 1430,845 1445,860 1445,1000 1363.7,1081.3 1278.7,1081.3 1231.33,1128.67 Q1.1
  Bottom Layer w10: v2(580,1235) 660.63,1235 U2.23
GND: C1.1 C2.1 C3.1 C4.1 C5.1 C6.1 C7.1 C8.1 C9.1 C10.1 C11.1 C12.1 C13.1 C14.1 C15.1 C16.1 C17.1 D2.2 D3.2 DS1.K J1.A1_B12 J1.B1_A12 J1.S1 J1.S2 J1.S3 J1.S4 J2.2 J3.3 LED.3-GND R4.2 R5.2 R15.1 R17.2 R19.2 R21.1 S1.2 S2.2 S3.4 S4.4 S5.4 S6.4 S7.4 S8.4 U1.2 U1.5 U2.2 U2.25 U3.4 U4.49 U5.2 | length 5543.5
  Top Layer w10: DS1.K DS1.K@390,475
  Top Layer w12: U1.5 282.2,1160.51 295,1147.72 U1.2 ; R4.2 427.6,1542.6 450,1565 615,1565 622.59,1557.41 622.59,1524.51 630.2,1516.9 630.2,1505.43 630.2,1494.61 J1.B1_A12 ; J1.S4 J1.S4@597.92,1505.43 ; J1.A1_B12 893.8,1494.61 J1.A1_B12@893.8,1505.43 ; J1.A1_B12@893.8,1505.43 893.8,1516.9 898.57,1521.68 898.57,1573.57 910,1585 1012.4,1585 R5.2 1017.11,1554.51 989.51,1554.51 963.72,1528.72 945.63,1528.72 932.08,1515.17 J1.S1 926.08,1505.43 J1.A1_B12@893.8,1505.43
  Top Layer w15: U1.2 339.44,1142.2 342.24,1145 v1(385,1145) ; DS1.K@390,475 v1(390,365) S2.2 480,300 505,275 v1(530,275) ; v1(543.53,429.01) 555.63,441.12 C6.1 ; J1.S4@597.92,1505.43 J1.B1_A12@630.2,1505.43 ; v1(635,1390) 650,1405 D2.2 ; D3.2 799.83,1399.86 820,1379.68 820,1360 819.94,1359.94 v1(819.74,1359.94) ; C11.1 1027.5,413.13 1054.7,413.13 1067.84,400 v1(1070,400) ; v1(1065,1415) v1@1070,1415 ; U3.4 v1(1316.3,775)
  Top Layer w20: v1@1070,1415 1085,1430 1085,1450 1119,1484 U5.2
  Top Layer w30: v1(-31.35,1609.74) -30,1608.39 -30,1590 -140,1480 -140,1225 170,915 C12.1 ; v1(45,1695) 47.6,1692.4 R15.1 ; C5.1 495,710.63 495,685 v1(500,680) ; C4.1 570,715.63 v1(570,680) ; C14.1@690,1089.37 692.5,1091.87 752.5,1091.87 760.64,1100 v1(880,1100) ; C7.1 v1(1083,936.36) ; C15.1 1549.37,1142.43 1566.94,1160 v1(1595,1160)
  Bottom Layer w8: v1(685,1340) 685,1335 710.36,1309.64 710.36,1285.27 U2.2
  Bottom Layer w15: C16.1 1069.37,1290 v1(1215,1290)
  Bottom Layer w20: v1(620,90) 620.66,89.34 642.44,89.34 671.73,60.04 LED.3-GND ; v1(980,95) 990,105 C2.1
  Bottom Layer w25: v1@1835,1135 1860.24,1160.24 S8.4
  Bottom Layer w30: S4.4 -285.43,1047.24 -215,1117.68 -215,1509.99 -232.57,1527.57 -278.55,1527.57 S7.4 ; S5.4 -12.2,237.2 140,85 375.85,85 v1(376.79,85.94) ; v1(895,1165) 895,1215.63 C17.1
  Bottom Layer w40: S7.4 -205.55,1534.45 v1(-15,1725)
  other v1: 1880,305 1820,310 1820,375 1875,375 1820,445 1875,445 840,695 760,700 885,700 795,720 475,730 580,730 746.54,741.84 855,745 795,760 767.29,781.89 870,785 903.64,791.73 1870,805 795,810 1805,810 850,825 900,845 1870,850 830,860 767.29,860.63 1805,865 1870,900 1805,910 1805,960 1865,960 1831.3,1130 710,1180 740,1180 770,1180 710,1245 740,1245 1830,1300 436.97,1330.79 405,1335 1830,1345 965,1355 995,1355 405,1380 445,1380 965,1390 995,1390 1835,1395 405,1420 440,1420 1835,1445 1270,1590 1300,1590 1330,1590 -70,1670 1000,1680 1045,1680 310,1690 365,1690 415,1690 -45,1700 1000,1720 1045,1720 310,1725 365,1725 415,1725
GPIO0: J5.2 Q2.3 U4.23 | length 1104.5
  Top Layer w10: v2(890,580) 917.23,607.23 U4.23 ; v2(955,1040) 957.23,1042.23 957.23,1084.92 966.04,1093.74 973.92,1093.74 982.73,1084.92 982.73,1082.03 v2(1019.76,1045) ; v3(1225,970) 1259.61,935.39 1304.61,935.39 1320.91,919.09 1320.91,899.48 J5.2
  Bottom Layer w10: v2(890,580) 940,630 940,865 955,880 v2(955,1040) ; v2(1019.76,1045) 1020,1044.76 1020,1020 1050,990 1140,990 1155,1005 1200,1005 1220.41,984.59 1220.41,974.59 v3(1225,970)
GPIO7: U3.3 U4.32 | length 618.8
  Top Layer w10: U4.32 1007.47,806.26 1011.21,810 v2(1015,810) ; v2(1205,810) 1335,810 1365,780 1365,630 1350.72,615.72 1316.78,615.72 U3.3@1316.3,615.24
  Bottom Layer w10: v2(1015,810) v2(1205,810)
GPIO8: U3.5 U4.33 | length 275.1
  Top Layer w10: U4.33 985.07,825.94 994.13,835 1040,835 1103.7,771.3 U3.5
GPIO10: R22.1 U3.1 U4.29 | length 908.4
  Top Layer w10: U4.29 993.46,747.2 995.66,745 1013.89,745 1014.44,744.44 v2(1015,745) ; U3.1 U3.1@1322.72,515 ; R22.1 1407.59,465 1345,465 1329.02,480.98 1329.02,508.71 U3.1@1322.72,515 ; v2(1435,750) 1435,590 1360,515 U3.1@1322.72,515
  Bottom Layer w10: v2(1015,745) 1017.5,747.5 1432.5,747.5 v2(1435,750)
GPIO11: U3.7 U4.30 | length 328.4
  Top Layer w10: U4.30 965.68,767.57 982.81,767.57 983.24,768 1036.49,768 1040,764.49 1040,585 1060,565 U3.7
GPIO17: U3.2 U4.27 | length 638.9
  Top Layer w10: U4.27 965.68,707.16 1017.84,707.16 v2(1020,705) ; U3.2 1365,565 1400,600 v2@1400,704.49
  Bottom Layer w10: v2(1020,705) v2(1400,705)
LEVEL_BAT: C15.2 R20.1 R21.2 U4.36 | length 1224.9
  Top Layer w10: U4.36 1025,885 v2(1035,895) ; R20.1@1370.01,1147.6 R20.1
  Top Layer w20: R21.2 R20.1@1370.01,1147.6 ; v1(1379.53,1104.94) 1380.1,1104.36 1410.64,1104.36 1420,1095 C15.2 1470.63,1144.37 1452.4,1162.6 R20.1
  Bottom Layer w10: v2(1035,895) 1035,965 993,1007 993,1127.98 1015,1149.98 1015,1245 1030,1260 1225,1260 1360,1125 1360,1124.46 v1(1379.53,1104.94)
NetANT1_1: ANT1.1 U4.2 | length 772.3
  Top Layer w10: 634.68,865.32 U4.2
  Top Layer w19.68: ANT1.1 19,763 70,814 253.68,814 305,865.32 634.68,865.32
NetC8_2: C8.2 R13.1 R14.2 U1.3 U1.4 | length 292.1
  Top Layer w10: 265.63,1183.78 U1.4 274.13,1184.72 274.53,1184.72 289.88,1184.72 290.28,1184.72 U1.3
  Top Layer w15: 265.63,1183.78 C8.2
  Top Layer w20: R14.2 238.19,1319.41 238.19,1305.57 240,1303.76 ; 240,1265.62 C8.2
  Top Layer w30: R13.1 C8.2 ; 240,1265.62 240,1303.76
NetD1_1: D1.1 R13.2 | length 176
  Top Layer w20: D1.1@140,1396.57 D1.1
  Top Layer w30: R13.2 102.6,1359.18 D1.1@140,1396.57
NetDS1_A: DS1.A R3.2 | length 117.3
  Top Layer w10: DS1.A 445,535 462.6,552.6 R3.2
NetDS2_A: DS2.A R18.2 | length 159.2
  Top Layer w20: DS2.A 1405,1345 1430,1370 1430,1417.6 R18.2
NetDS2_K: DS2.K U5.1 | length 115.7
  Top Layer w20: U5.1 1245.91,1414.09 1273.1,1386.9 1273.1,1351.9 DS2.K
NetLED_4-DIN: LED.4-DIN R12.2 | length 135.6
  Bottom Layer w10: R12.2 636.77,155 671.73,189.96 LED.4-DIN
NetQ3_3: Q3.3 R14.1 | length 101.9
  Top Layer w20: R14.1 R14.1@301,1338.6 ; Q3.3@301,1434 Q3.3@302,1435
  Top Layer w30: R14.1@301,1338.6 Q3.3@301,1434
NetR2_1: R2.1 S2.1 U4.15 | length 1031.8
  Top Layer w10: S2.1 100,350 v2(155,405) ; v2(720,480) 745,455 R2.1 ; U4.15 759.75,570.25 v2(760,570)
  Bottom Layer w10: v2(155,405) 225,335 575,335 v2(720,480) 760,520 v2(760,570)
NetR3_1: R3.1 U4.12 | length 192.5
  Top Layer w10: R3.1 542.4,605 v2(595,605) ; v2(660,635) 660,650.8 677.67,668.46 U4.12
  Bottom Layer w10: v2(595,605) 630,605 v2(660,635)
NetR16_2: R16.2 U4.19 | length 290.9
  Top Layer w10: U4.19 838.49,595.3 850,583.79 v2(850,580)
  Bottom Layer w10: v2(850,580) 850,576.21 845,571.21 845,495 890,450 890,375.2 R16.2
NetR17_1: R17.1 R19.1 U5.5 | length 194.4
  Top Layer w20: R19.1 R17.1 1149.54,1351.95 1149.54,1444.6 1151.54,1446.6 U5.5
NetR23_1: R23.1 U4.41 | length 248.4
  Top Layer w10: v2(805,1055) 843.8,1055 858.17,1040.62 U4.41
  Bottom Layer w10: R23.1 791.21,1045 801.21,1055 v2(805,1055)
RESET: C6.2 J5.1 Q1.3 R1.2 S1.1 U4.9 | length 1950.2
  Top Layer w10: U4.9 637.52,727.52 620,710 620,535 634.37,520.63 C6.2 ; v2(870,515) 866.21,515 863.21,512 656.37,512 C6.2 ; R1.2 782.4,287.6 S1.1 775,349.38 C6.2 ; v2(1175,975) 1225.02,1025.02 Q1.3 1228.96,1091.26 1237.77,1082.45 1237.77,1078.52 1374.61,941.68 J5.1
  Bottom Layer w10: v2(870,515) 900,515 970,585 970,840 985,855 1055,855 v2(1175,975)
RTS: J6.2 Q1.2 Q2.1 U2.19 | length 888.4
  Top Layer w10: v2(600,1135) 995,1135 1015,1115 1015,1100 1036.76,1078.24 1036.76,1065.15 1045.57,1056.33 Q2.1 1053.5,1056.45 1060.26,1050.05 1201.97,916.02 1204.89,913.1 1205,909.12 J6.2 ; Q2.1@1055.92,1053.86 Q1.2
  Bottom Layer w10: v2(600,1135) 625.79,1135 647.27,1156.47 U2.19
RXD: J3.1 U2.21 U4.40 | length 852
  Top Layer w10: U4.40 878.54,913.77 v2(878.54,1038.54)
  Bottom Layer w10: J3.1 534.21,1230.79 545,1220 545,1207.55 556.7,1195.84 ; U2.21 556.7,1195.84 ; v2(878.54,1038.54) 818.54,1038.54 775,995 625,995 523,1097 523,1162.14 556.7,1195.84
TXD: J3.2 R23.2 U2.20 | length 577.1
  Top Layer w10: J3.2 450,1280 440,1270 440,1195 515,1120 v2@547.74,1120
  Bottom Layer w10: v2(550,1120) 570,1140 ; U2.20 586.16,1176.16 570,1160 570,1140 ; R23.2 670.6,1047 618,1047 570,1095 570,1140
VBAT: C9.2 J2.1 Q3.2 R20.2 U5.3 | length 2649.1
  Top Layer w20: v3(195,1535) 197.71,1535 200.93,1531.78 Q3.2 ; v3(1295,1550) 1266.4,1521.4 U5.3 1246.74,1520.57 1284.43,1520.57 1344.37,1460.63 1360,1460.63 C9.2
  Top Layer w30: R20.2 1388.94,1237.4 1557.5,1405.96 1557.5,1662.5 J2.1
  Bottom Layer w25: v3(195,1535) 480,1535 525,1580 525,1710 570,1755 1240,1755 1443.59,1551.41 1493.59,1551.41 1557.82,1615.65 1557.82,1662.82 J2.1 ; v3(1295,1550) 1445,1550
VBUS: C10.2 D1.2 J1.A4_B9 J1.B4_A9 J4.1 Q3.1 R15.2 R18.1 U2.8 U5.4 | length 2089.6
  Top Layer w20: D1.2@140,1491.06 D1.2 ; J1.B4_A9 669.32,1490.61 669.32,1514.33 685,1530 685,1595 702.6,1612.6 ; 710,1620 800,1620 825,1595 825,1544 854.68,1514.33 854.68,1490.61 J1.A4_B9 v2@856.49,1264.45 ; 1154.09,1620.68 1165.8,1632.4 ; R18.1@1438.72,1513.68 R18.1
  Top Layer w30: R15.2 110,1570 140,1540 D1.2 ; J4.1 80,1140 30,1190 30,1381.06 D1.2@140,1491.06 ; 335,1600 338.38,1596.62 Q3.1 ; 515,1610 520,1605 615,1605 630,1620 710,1620 702.6,1612.6 ; U5.4 1154.09,1620.68 ; C10.2 1215.63,1655 1215.63,1680.63 1250,1715 1340,1715 1438.72,1616.28 R18.1@1438.72,1513.68
  Bottom Layer w10: U2.8 849.14,1235.21 855,1241.07 855,1262.91 v2(856.52,1264.42)
  other v2: 1102.32,1654.35 1150,1655 1102.32,1709.35 1150,1710
  other v3: 385,1595 450,1595 385,1645 450,1645
pads on no net: ANT1.2 J1. J1.A8 J1.B8 LED.2-DOUT MH1.1 MH2.1 MH3.1 MH4.1 S3.2 S3.3 S4.2 S4.3 S5.2 S5.3 S6.2 S6.3 S7.2 S7.3 S8.2 S8.3 U2.1 U2.9 U2.10 U2.11 U2.12 U2.13 U2.14 U2.15 U2.16 U2.17 U2.18 U2.22 U2.24 U4.5 U4.6 U4.7 U4.8 U4.10 U4.17 U4.18 U4.20 U4.21 U4.22 U4.26 U4.28 U4.34 U4.35 U4.39 U4.42 U4.44 U4.45 U4.47 U4.48

## Polygon pours and split planes (outlines as drawn)
VBUS on PWR "VBUS_L03_P004" (solid, pour order 4): 75,1740 75,1205 80,1200 565,1200 1780,1200 1780,1740
+3V3 on PWR "+3V3_L03_P005" (solid, pour order 5): 407.5,1070 407.5,805 332.5,805 332.5,30 1760,30 1760,1070
+3V3 on Top Layer "+3V3_L01_P009" (solid, pour order 9): 260,1120 325,1120 325,1050 340,1035 515,1035 530,1050 645,1050 645,950 325,950 325,980 260,1045 260,1125
GND on Top Layer "GND_L01_P012" (solid, pour order 12): 285,1740 285,1680 960,1680 995,1645 995,1535 1070,1535 1075,1540 1065,1550 1065,1740
GND on Top Layer "GND_L01_P010" (solid, pour order 10): 350,515 400,515 400,430 415,415 515,415 515,520 585,520 585,330 730,185 735,190 1015,190 1015,80 1010,75 585,75 405,255 350,255
VBUS on Top Layer "VBUS_L01_P017" (solid, pour order 17): 530,1655 530,1585 75,1585 75,1655
GND on Top Layer "GND_L01_P014" (solid, pour order 14): 955,1400 1005,1400 1005,1310 1015,1300 1315,1300 1315,1195 1175,1195 1120,1250 955,1250
GND on Top Layer "GND_L01_P013" (solid, pour order 13): 1258.97,1671 1259.97,1670 1315,1670 1315,1620 1380,1555 1400,1555 1400,1495 1350,1495 1350,1555 1325,1580 1260,1580 1260,1670
GND on Top Layer "GND_L01_P011" (solid, pour order 11): 350,1065 350,1200 330,1200 315,1215 315,1275 345,1275 390,1320 390,1535 455,1535 455,1360 525,1360 525,1310 445,1310 425,1290 425,1065
VBUS on Top Layer "VBUS_L01_P006" (solid, pour order 6): 1235,1735 1090,1735 1085,1730 1085,1620.68 1230.68,1620.68 1235,1625
GND on Bottom Layer "GND_L04_P015" (solid, pour order 15): 1940,190 1762.51,190 1767.15,1485 1940,1485
GND on GND "GND_L02_P001" (solid, pour order 1): 340,35 340,748.73 710,751.2 710,1545 1275,1545 710,1545 710,1655 710,1135 580,1265 580,1305 -130,1305 -130,1740 1915,1740 1915,35

## Other copper
GND:
  pour cut-out: 1760,35 1760,200 1915,200 1915,35
  pour cut-out: 1770,1740 1770,1575 1915,1575 1915,1740

## Silkscreen, mask and mechanical layers (free items; w line width, h text height)
Top Overlay:
  text "+" at 1510,1359.48 h60
  text "GND" at 526.05,1320.22 h40
  text "TX" at 526.05,1263.28 h40
  text "RX" at 529.05,1182.28 h40
  text "-" at 1505,1104.77 h60
  text "5V+" at 59.05,1072.71 h40
  text "3V3+" at 155,1070.44 h40
  text "RTS" at 1150,830.44 h40
  text "DTR" at 1235,830 h40
  text "EN" at 1450,810 h50 r135
  text "IO0" at 1389.61,804.61 h50 r135
Bottom Overlay:
  drawing of 18 lines, arcs and shapes, not listed
Top Solder:
  region: 191.57,1533.93 192.07,1533.93 192.07,1533.43 192.56,1533.43 192.56,1532.94 192.07,1532.94 192.07,1533.43 191.57,1533.43 191.57,1533.93 191.08,1533.93 191.08,1534.43 191.57,1534.43
Mechanical 1:
  lines w10: -393.7,115 -393.7,1650 cw(c-273.7,1650) -273.7,1770 ; -393.72,120 ccw(c-276.22,117.5) -278.72,0 ; -278.72,-1.85 1848.68,-1.85 ; -270,1769.8 1848.7,1769.8 ; 1848.68,0 ccw(c1851.18,117.5) 1968.68,115 ; 1848.7,1770 cw(c1848.7,1650) 1968.7,1650 ; 1968.5,114.8 1968.5,1655.2

## Text inside footprints (layer, text, board x,y; h text height)
DS1: Top Overlay "K" at 302.72,480.15 h22; Top Overlay "A" at 488.25,483.11 h20
DS2: Top Overlay "A" at 1393.25,1338.11 h20; Top Overlay "K" at 1207.72,1335.15 h22
J1: Mechanical 13 "PCB EDGE" at 549.4,1774.43 h16 r180